# Altium PCB Mppt_PCB_seb.PcbDoc
Units mil, origin at the board's own origin, x right, y up, seen from the top; angles counter-clockwise.
Board outline 6000 x 4000 mil, 2 copper layers (Top Layer, Bottom Layer); 89 components, 51 nets, 266 pads, 9 vias.
Unrouted connection lines stored in the file: 163.
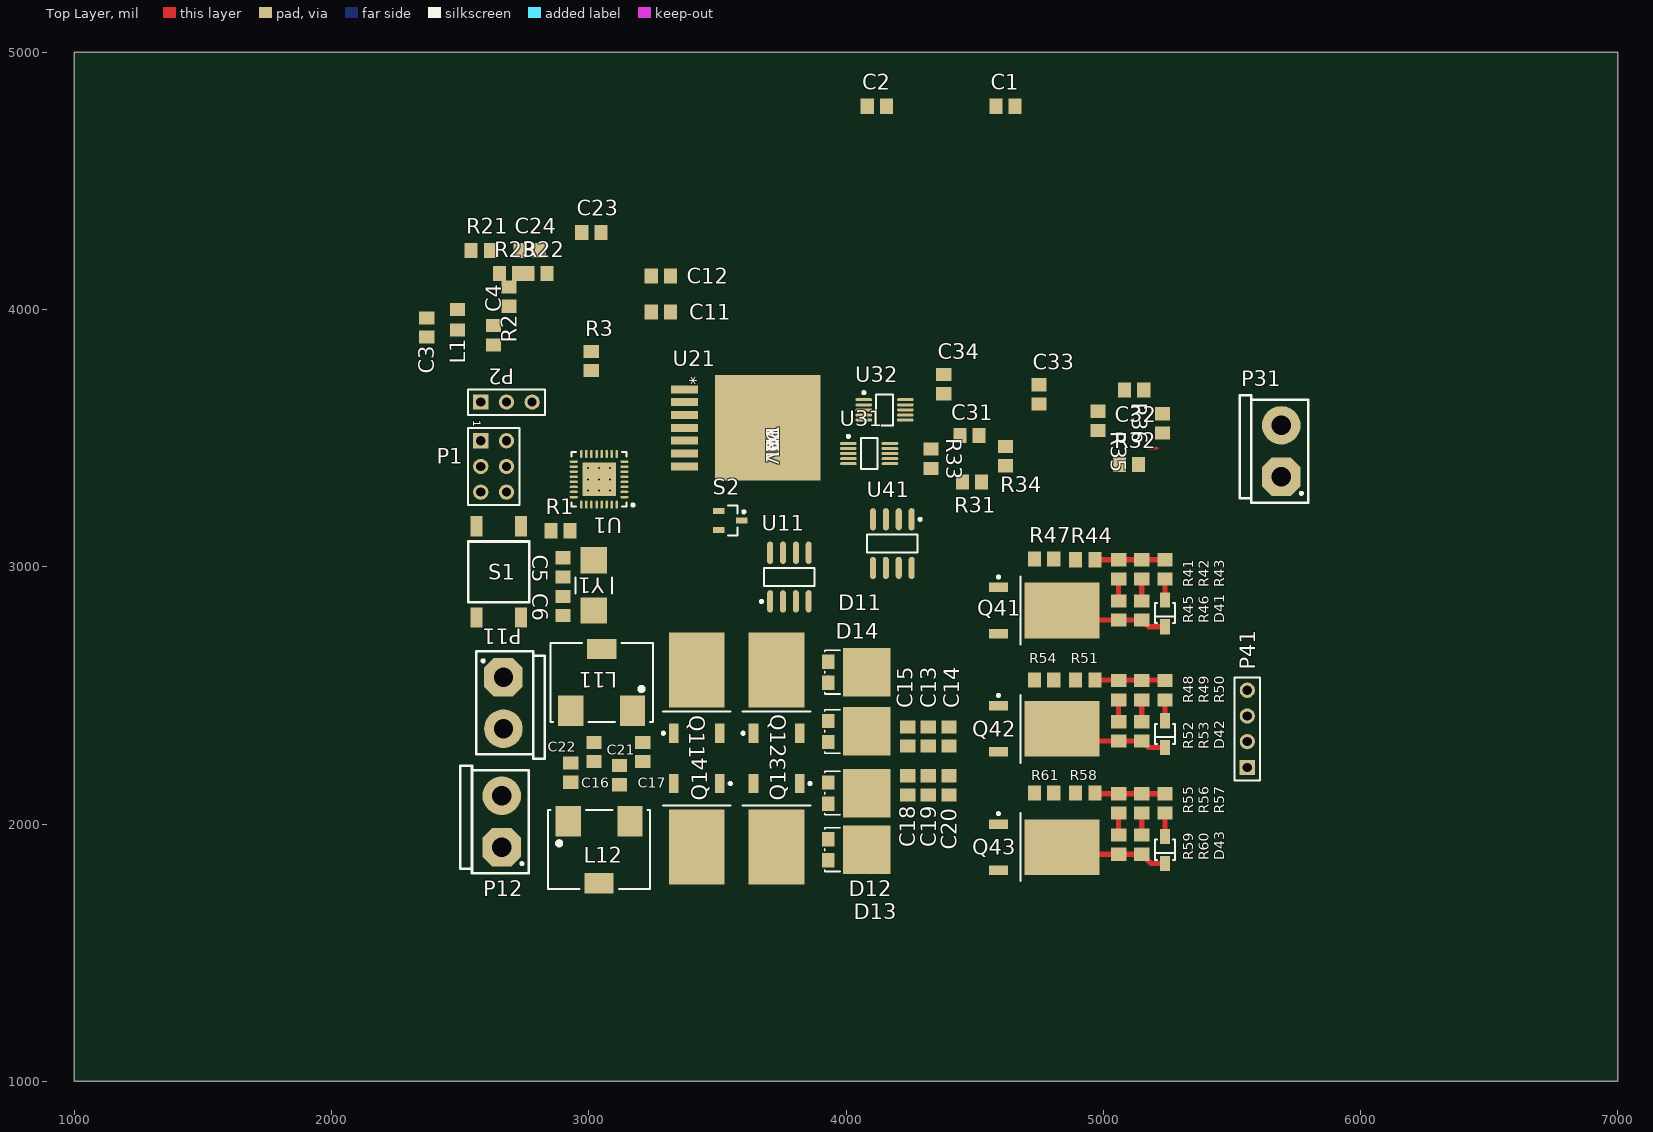
[diagram p0: Top Layer view]
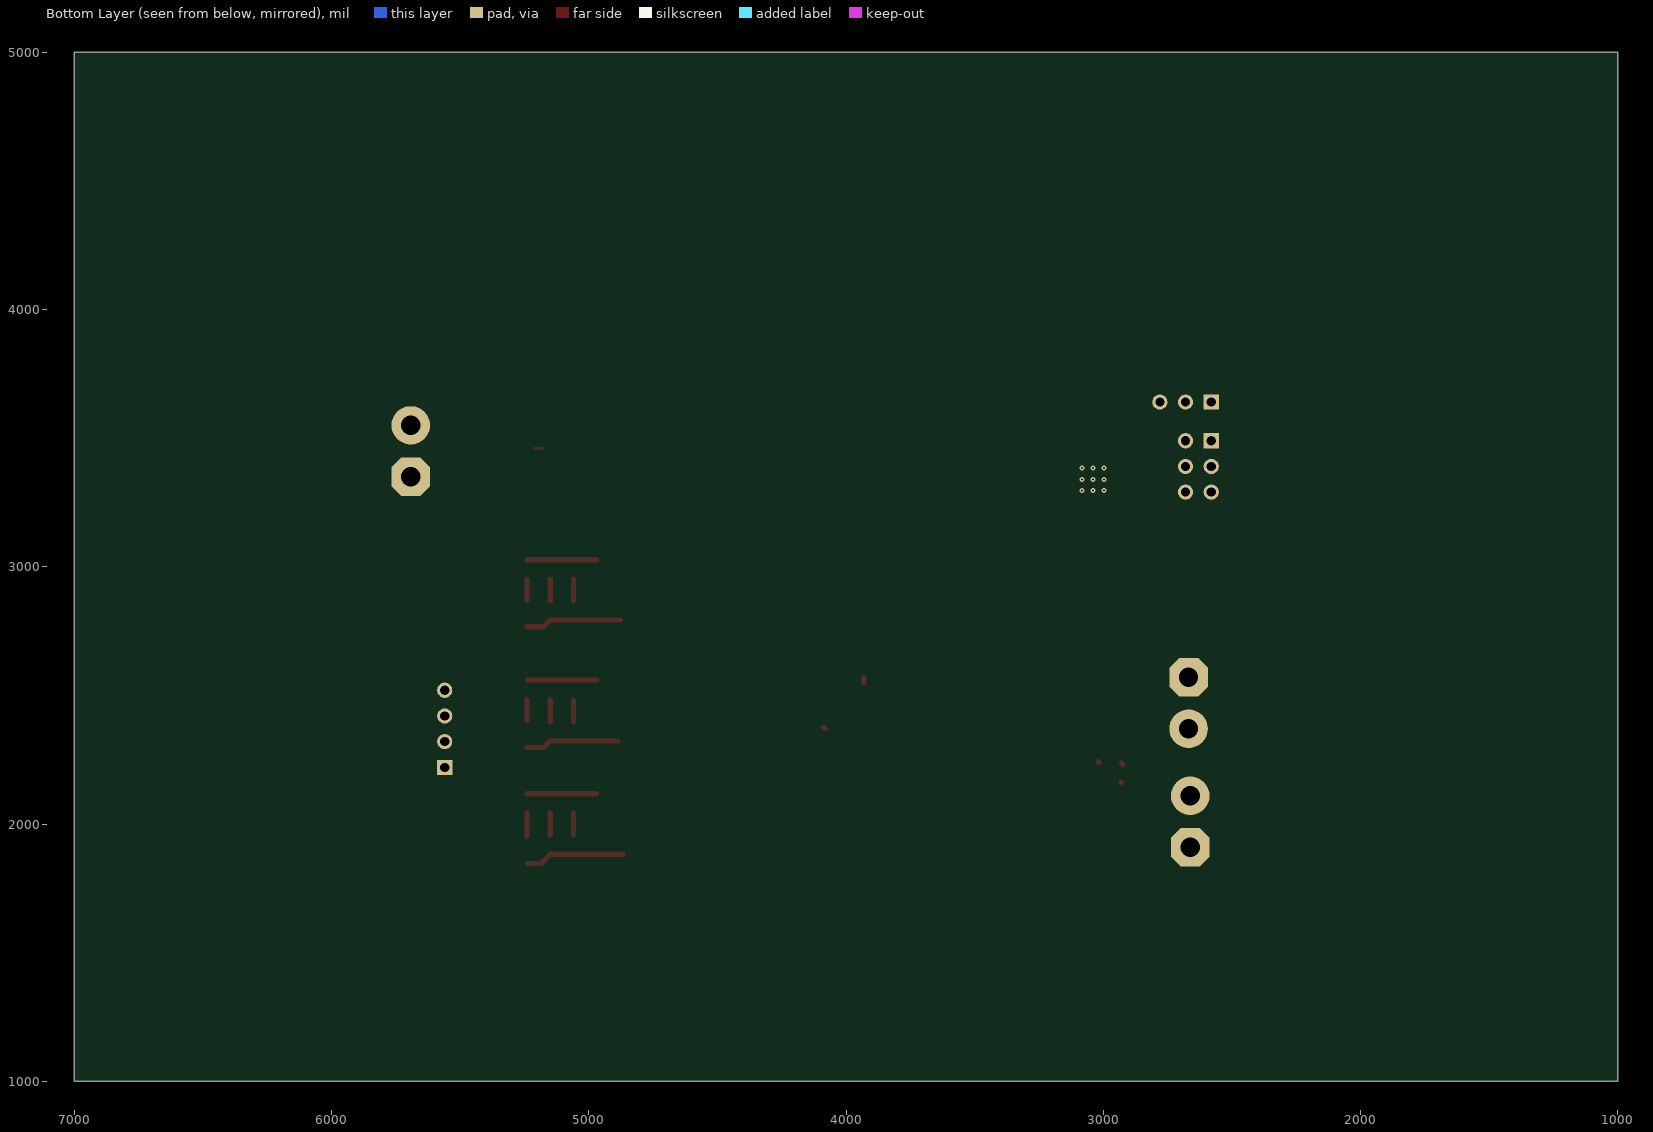
[diagram p1: Bottom Layer view, seen from below]

## Layer stack, top to bottom
Top Layer: signal copper 1.4
Dielectric: dielectric 12.6, FR-4, Dk 4.8
Bottom Layer: signal copper 1.4

## Board outline
1000,1000 7000,1000 7000,5000 1000,5000

## Design rules (kind name [scope] priority, off if disabled: settings)
Clearance Clearance_uC [InNetClass('uC')] p1: gap=6
Clearance [All] p2: gap=10
PolygonConnect [All] p1: connectstyle=Relief reliefconductorwidth=10 reliefentries=4 polygonreliefangle="90 Angle" airgapwidth=10
RoomDefinition Mppt_Sheet1 [InComponentClass('Mppt_Sheet1')] p1: confinementstyle=ConfineIn formatcopy=TRUE lockcomponents=FALSE outline 0,0 2000,0 2000,1000 0,1000
RoomDefinition CurrentSensor [InComponentClass('CurrentSensor')] p2: confinementstyle=ConfineIn formatcopy=TRUE lockcomponents=FALSE outline 0,0 2000,0 2000,1000 0,1000
RoomDefinition Buck [InComponentClass('Buck')] p3: confinementstyle=ConfineIn formatcopy=TRUE lockcomponents=FALSE outline 0,0 2000,0 2000,1000 0,1000
RoomDefinition Boost [InComponentClass('Boost')] p4: confinementstyle=ConfineIn formatcopy=TRUE lockcomponents=FALSE outline 0,0 2000,0 2000,1000 0,1000
RoomDefinition Balancer [InComponentClass('Balancer')] p5: confinementstyle=ConfineIn formatcopy=TRUE lockcomponents=FALSE outline 0,0 2000,0 2000,1000 0,1000
RoutingVias [All] p1: holewidth=28 width=50 viastyle="Through Hole" minholewidth=28 minwidth=50 maxholewidth=28 maxwidth=50
SolderMaskExpansion [All] p1: expansion=4
Width [All] p1: maxlimit=20 minlimit=20 preferedwidth=20
Width Width_Power [InNetClass('Power')] p2: maxlimit=30 minlimit=30 preferedwidth=30
Width Width_uC [InNetClass('uC')] p3: maxlimit=10 minlimit=10 preferedwidth=10
28 further rules are at their usual default settings.

## Classes and differential pairs
component class Balancer: D41 D42 D43 P41 Q41 Q42 Q43 R41 R42 R43 R44 R45 R46 R47 R48 R49 R50 R51 R52 R53 R54 R55 R56 R57 R58 R59 R60 R61 U41
component class Boost: C11 C12 C13 C14 C15 C16 C17 C18 C19 C20 C21 C22 D11 D12 D13 D14 L11 L12 P11 P12 Q11 Q12 Q13 Q14 U11
component class Buck: C23 C24 R21 R22 R23 U21
component class CurrentSensor: C31 C32 C33 C34 P31 R31 R32 R33 R34 R35 R36 U31 U32
component class Mppt_Sheet1: C1 C2 C3 C4 C5 C6 L1 P1 P2 R1 R2 R3 S1 S2 U1 Y1
net class Power: GND NetC13_2 NetC16_2 NetC18_2 NetC21_2 NetC23_1 NetD11_A1 NetD13_A1 NetD41_1 NetD41_2 NetD42_1 NetD42_2 NetD43_1 NetD43_2 NetP41_2 NetP41_3 NetR41_1 NetR42_1 NetR48_1 NetR49_1 NetR55_1 NetR56_1
net class uC: +5V GND NetC2_1 NetC3_2 NetC4_2 NetC5_1 NetC6_1 NetC31_1 NetC31_2 NetC32_1 NetC32_2 NetP1_1 NetP1_3 NetP1_4 NetP2_1 NetP2_2 NetQ43_1 NetR3_1 NetR44_1 NetR51_1 NetR58_1 NetU1_2 NetU1_15 NetU1_17 NetU31_1 NetU32_1

## Components (designator, comment, footprint, x,y, rotation, side; value= is the part's Value field where it differs from the comment)
C1 "Cap_cer_100n_50V" _0805 4620,4790 r0 top
C2 "Cap_cer_10n_50V" _0805 4120,4790 r0 top
C3 "Cap_cer_100n_50V" _0805 2370,3930 r90 top
C4 "Cap_cer_100n_50V" _0805 2630,3900 r90 top
C5 "Cap_cer_12p_50V" _0805 2900,2997.48 r270 top
C6 "Cap_cer_12p_50V" _0805 2900,2847.48 r270 top
C11 "Cap_cer_4.7u_50V" _0805 3280,3990 r180 top
C12 "Cap_cer_100n_50V" _0805 3280,4130 r180 top
C13 "" _0805 4320,2340 r90 top
C14 "Cap_cer_22µ_25V" _0805 4400,2340 r90 top
C15 "Cap_cer_100n_50V" _0805 4240,2340 r90 top
C16 "Cap_cer_22µ_25V" _0805 3020,2280 r90 top
C17 "Cap_cer_100n_50V" _0805 3210,2280 r90 top
C18 "Cap_cer_22µ_25V" _0805 4240,2150 r270 top
C19 "Cap_cer_22µ_25V" _0805 4320,2150 r270 top
C20 "Cap_cer_100n_50V" _0805 4400,2150 r270 top
C21 "Cap_cer_22µ_25V" _0805 3120,2190 r270 top
C22 "Cap_cer_100n_50V" _0805 2930,2200 r270 top
C23 "Cap_cer_10n_50V" _0805 3010,4300 r0 top
C24 "Cap_cer_100n_50V" _0805 2770,4230 r0 top
C31 "Cap_cer_100n_50V" _0805 4480,3510 r0 top
C32 "Cap_cer_100n_50V" _0805 5120,3687.4 r0 top
C33 "Cap_cer_100n_50V" _0805 4750,3670 r90 top
C34 "Cap_cer_100n_50V" _0805 4380,3710 r90 top
D11 "V10P45S" TO-277A 4040,2590 r270 top
D12 "V10P45S" TO-277A 4040,2360 r270 top
D13 "V10P45S" TO-277A 4040,1900 r270 top
D14 "V10P45S" TO-277A 4040,2120 r270 top
D41 "LED_SMD" LED_SMD 5240,2820 r90 top
D42 "LED_SMD" LED_SMD 5240,2350 r90 top
D43 "LED_SMD" LED_SMD 5240,1900 r90 top
L1 "IND_47u_0A055" COIL_0805 2490,3960 r270 top
L11 "HCF1007" HCF1007 3050,2550 r180 top
L12 "HCF1007" HCF1007 3040,1900 r0 top
P1 "Header 3X2" HDR2X3 2580,3490 r270 top
P2 "Header 3" HDR1X3 2580,3640 r0 top
P11 "WRTBL_2P_508" WRTBL_2P_508 2660,2470 r270 top
P12 "WRTBL_2P_508" WRTBL_2P_508 2670,2010 r90 top
P31 "WRTBL_2P_508" WRTBL_2P_508 5700,3450 r90 top
P41 "Header 4" HDR1X4 5560,2220 r90 top
Q11 "IRFR024N" TO-252AA_N 3420,2530 r90 top
Q12 "IRFR024N" TO-252AA_N 3730,2530 r90 top
Q13 "IRFR024N" TO-252AA_N 3730,1980 r270 top
Q14 "IRFR024N" TO-252AA_N 3420,1980 r270 top
Q41 "IRFR024N" TO-252AA_N 4770,2830 r0 top
Q42 "IRFR024N" TO-252AA_N 4770,2370 r0 top
Q43 "IRFR024N" TO-252AA_N 4770,1910 r0 top
R1 "Res_0805" _0805 2890,3140 r0 top
R2 "Res_0805" _0805 2690,4050 r90 top
R3 "Res_0805" _0805 3010,3800 r90 top
R21 "Res_0805" _0805 2580,4230 r180 top
R22 "Res_0805" _0805 2800,4140 r0 top
R23 "Res_0805" _0805 2690,4140 r180 top
R31 "Res_0805" _0805 4490,3330 r0 top
R32 "Res_0805" _0805 5100,3397.4 r0 top
R33 "Res_0805" _0805 4330,3420 r90 top
R34 "Res_0805" _0805 4620,3430 r270 top
R35 "Res_0805" _0805 4980,3567.4 r270 top
R36 "Res_0805" _0805 5230,3557.4 r270 top
R41 "Res_0805" _0805 5060,2990 r90 top
R42 "Res_0805" _0805 5150,2990 r90 top
R43 "Res_0805" _0805 5240,2990 r90 top
R44 "Res_0805" _0805 4930,3027.4 r0 top
R45 "Res_0805" _0805 5060,2830 r90 top
R46 "Res_0805" _0805 5150,2830 r90 top
R47 "Res_0805" _0805 4770,3030 r0 top
R48 "Res_0805" _0805 5060,2520 r90 top
R49 "Res_0805" _0805 5150,2520 r90 top
R50 "Res_0805" _0805 5240,2520 r90 top
R51 "Res_0805" _0805 4930,2560 r0 top
R52 "Res_0805" _0805 5060,2360 r90 top
R53 "Res_0805" _0805 5150,2360 r90 top
R54 "Res_0805" _0805 4770,2560 r0 top
R55 "Res_0805" _0805 5060,2080 r90 top
R56 "Res_0805" _0805 5150,2080 r90 top
R57 "Res_0805" _0805 5240,2080 r90 top
R58 "Res_0805" _0805 4930,2120 r0 top
R59 "Res_0805" _0805 5060,1920 r90 top
R60 "Res_0805" _0805 5150,1920 r90 top
R61 "Res_0805" _0805 4770,2120 r0 top
S1 "Reset" SWITCH_SMD 2650,2980 r90 top
S2 "ZRC400" SOT23_N 3550,3180 r0 top
U1 "ATtiny26L-8MU" 32M1-A_N 3040,3340 r180 top
U11 "MAX4427ESA" NSO8_N 3780,2960 r90 top
U21 "LMZ12001_NDW_7" TZA07A 3690,3540 r270 top
U31 "MAX9611AUB+" MAXM-U10+2_N 4090,3440 r0 top
U32 "MAX9611AUB+" MAXM-U10+2_N 4150,3610 r0 top
U41 "MAX4427ESA" NSO8_N 4180,3090 r270 top
Y1 "Crystal_16.0MHz" XTAL_SMD 3020,2927.48 r90 top

## Footprints (in the part's own frame and the unit in brackets; to place one, negate y for a bottom-side part, rotate by r counter-clockwise, add the part's x,y. Pads: shape width x height; smd on the part's side, far side on the other; paste and mask are expansions set on the pad)
32M1-A_N [mm] "QFN, 32-Leads, Body 5x5mm, Pitch 0.5mm, Thermal Pad 3.3x3.3mm, IPC Medium Density"
  oval 0.8x0.25 smd: 1(-2.5,1.75) 2(-2.5,1.25) 3(-2.5,0.75) 4(-2.5,0.25) 5(-2.5,-0.25) 6(-2.5,-0.75) 7(-2.5,-1.25) 8(-2.5,-1.75) 17(2.5,-1.75) 18(2.5,-1.25) 19(2.5,-0.75) 20(2.5,-0.25) 21(2.5,0.25) 22(2.5,0.75) 23(2.5,1.25) 24(2.5,1.75)
  oval 0.25x0.8 smd: 9(-1.75,-2.5) 10(-1.25,-2.5) 11(-0.75,-2.5) 12(-0.25,-2.5) 13(0.25,-2.5) 14(0.75,-2.5) 15(1.25,-2.5) 16(1.75,-2.5) 25(1.75,2.5) 26(1.25,2.5) 27(0.75,2.5) 28(0.25,2.5) 29(-0.25,2.5) 30(-0.75,2.5) 31(-1.25,2.5) 32(-1.75,2.5)
  rect 3.3x3.3 smd: 33(0,0)
  silkscreen extent -3.48,-2.7 2.7,2.7, body extent -2.55,-2.55 2.55,2.55, height 1
_0805 [mm]
  rect 1.3x1.5 smd: 1(-0.95,0) 2(0.95,0)
  body extent -1,-0.64 1,0.62, height 0.78
COIL_0805 [mm]
  rect 1.3x1.5 smd: 1(-1.014,0) 2(1.014,0)
  body extent -1,-0.64 1,0.62, height 0.78
HCF1007 [mm]
  rect 2.5x3 smd: 1(-3.05,2.8) 2(3.05,2.8)
  rect 2.9x2 smd: ""(0,-3.3)
  silkscreen extent -5.05,-3.9 5.05,3.9
HDR1X3 [mm] "Connector; Header; 3 Position"
  rect 1.5x1.5 hole 0.9: 1(0,0)
  round 1.5 hole 0.9: 2(2.54,0) 3(5.08,0)
  silkscreen extent -1.27,-1.27 6.35,1.27, body extent -0.3,-0.29 5.38,0.3, height 7
HDR1X4 [mm] "Connector; Header; 4 Position"
  rect 1.5x1.5 hole 0.9: 1(0,0)
  round 1.5 hole 0.9: 2(2.54,0) 3(5.08,0) 4(7.62,0)
  silkscreen extent -1.27,-1.27 8.89,1.27, body extent -0.3,-0.29 7.92,0.3, height 7
HDR2X3 [mm] "Connector; Header; 3x2 Position"
  rect 1.5x1.5 hole 0.9: 1(0,0)
  round 1.5 hole 0.9: 2(0,2.54) 3(2.54,0) 4(2.54,2.54) 5(5.08,0) 6(5.08,2.54)
  silkscreen extent -1.27,-1.27 6.35,3.81, body extent -0.3,-0.29 5.38,2.84, height 7
LED_SMD [mm]
  rect 1.5x1 smd: 1(1.298,0) 2(-1.349,0)
  silkscreen extent -1,-0.98 1,0.98, body extent -1.12,-0.85 1.23,0.85, height 1.3
MAXM-U10+2_N [mm] "SOP, 10-Leads, Body 3x3mm, Pitch 0.5mm, IPC Medium Density"
  oval 1.65x0.3 smd: 1(-2.05,1) 2(-2.05,0.5) 3(-2.05,0) 4(-2.05,-0.5) 5(-2.05,-1) 6(2.05,-1) 7(2.05,-0.5) 8(2.05,0) 9(2.05,0.5) 10(2.05,1)
  silkscreen extent -2.17,-1.52 0.82,1.82, body extent -1.55,-1.55 1.55,1.55, height 1.1
NSO8_N [mm] "SOIC, 8-Leads, Body 4.9x3.9mm, Pitch 1.27mm, IPC Medium Density"
  oval 2.2x0.6 smd: 1(-2.4,1.905) 2(-2.4,0.635) 3(-2.4,-0.635) 4(-2.4,-1.905) 5(2.4,-1.905) 6(2.4,-0.635) 7(2.4,0.635) 8(2.4,1.905)
  silkscreen extent -2.52,-2.5 0.9,2.88, body extent -2,-2.5 2,2.5, height 1.75
SOT23_N [mm] "SOT23, 3-Leads, Body 2.9x1.3mm, Pitch 0.95mm, Lead Span 2.3mm - Reverse Pinning, IPC Medium Density"
  rect 1.15x0.6 smd: 1(1.125,0) 2(-1.125,-0.95) 3(-1.125,0.95)
  silkscreen extent -0.2,-1.5 1.48,1.5, body extent -0.7,-1.5 0.7,1.5, height 1.1
SWITCH_SMD [mm]
  rect 2x1.2 smd: 1(-4.5,2.2) 1(4.5,2.2) 2(-4.5,-2.2) 2(4.5,-2.2)
  silkscreen extent -3,-3 3,3, body extent -5.02,-3 5.02,2.95, height 5
TO-252AA_N [mm] "D-PAK, 4-Leads, Body 6.1x6.5mm, Pitch 2.28mm, Lead Span 9.9mm, IPC Medium Density"
  rect 1.9x0.95 smd: 1(-4.5,2.28) 3(-4.5,-2.28)
  rect 7.4x5.5 smd: 4(1.75,0)
  silkscreen extent -4.62,-3.35 -2.35,3.43, body extent -2.25,-3.37 4.1,3.37, height 2.38
TO-277A [mm]
  rect 1.4x1.27 smd: 1(1.04,-2.765) 2(-1.04,-2.765)
  rect 4.8x4.72 smd: K(0,1.04)
  silkscreen extent -2.15,-3.1 2.15,-1.6
TZA07A [mil]
  rect 31x105 smd: 1(-150,-318) 2(-100,-318) 3(-50,-318) 4(0,-318) 5(50,-318) 6(100,-318) 7(150,-318)
  rect 410x410 smd: 8(0,6)
WRTBL_2P_508 [mil]
  oct 150x150 hole 75: 1(-100.37,8.33)
  round 150 hole 75: 2(99.63,8.33)
  silkscreen extent -201,-97 217,169, body extent -190,-95 205,168, height 550
XTAL_SMD [mm]
  rect 2.6x2.6 smd: 1(-2.476,0) 2(2.476,0)
  silkscreen extent -0.8,-1.8 0.8,1.8, body extent -2.4,-1.8 2.4,1.8, height 1.4

## Part data
C1 C3 C4 C11 C12 C13 C14 C15 C16 C17 C18 C19 C20 C21 C22 C24 C33 C34: library part Cap_124
C2 C23 C31 C32: library part Cap_120
C5 C6: library part Cap_109
D11 D12 D13 D14: "V01P45 Shottky Diode"
D41 D42 D43: library part DIODE_48
L1: library part Ind_41, "Inductor"
L11 L12: "HCF1007 Inductor"
P1: library part Con_41
P2: library part Con_32
P11 P12 P31: library part Con_7
P41: library part Con_33
Q11 Q12 Q13 Q14 Q41 Q42 Q43: "HEXFET N-Channel Power MOSFET"
R1 R2 R3 R21 R22 R23 R31 R32 R33 R34 R35 R36 R41 R42 R43 R44 R45 R46 R47 R48 R49 R50 R51 R52 R53 R54 R55 R56 R57 R58 R59 R60 R61: library part Res_6
S1: library part Misc_11
S2: library part Misc_1, "4,096V Voltage Regulator"
U1: "8-bit AVR Microcontroller, 2.7-5.5V, 8MHz, 2KB Flash, 128 Bytes EEPROM, 128 Bytes SRAM, 32-pin MLF, Industrial Grade (-40°C to 85°C), Pb-Free"
U11 U41: "Dual High-Speed 1.5A MOSFET Driver"
U21: "Imported"
U31 U32: "High-side Current-Sense Amplifier with 12-bit I2C ADC and Op Amp / Comparator - Non-inverting, Adjustable Gain, -40 to 125 degC, 10-Pin SOP (U10+2), Pb-Free"
Y1: library part Crystal_19

## Via types
v1: diameter 19.68, hole 7.87, Top Layer to Bottom Layer, 9 vias

## Nets (pads, with @x,y where several pads share a name; then routed paths per layer and width w, separated by ;. In a path a pad name is that pad's centre, name@x,y a point inside that pad or via, vN(x,y) a via of type N, cw(c..) or ccw(c..) an arc to the next point about the centre after c; other vN are vias at no path point)
+5V: C1.2 C11.2 C12.2 C24.2 C33.1 C34.2 P1.2 R1.1 R2.1 R3.2 R22.1 U1.4 U11.6 U21.7 U31.10 U32.9 U32.10
GND: C1.1 C2.2 C3.1 C4.1 C5.2 C6.2 C11.1 C12.1 C13.1 C14.1 C15.1 C16.1 C17.1 C18.1 C19.1 C20.1 C21.1 C22.1 C23.2 C24.1 C33.2 C34.1 P1.6 P2.3 P11.2 P12.2 P31.2 P41.1 Q11.3 Q12.3 Q13.3 Q14.3 Q43.3 R23.2 R47.1 R54.1 R61.1 S1.2 S2.1 S2.2 U1.5 U1.21 U11.3 U21.4 U31.4 U31.5 U31.8 U31.9 U32.4 U32.5 U32.8 U41.3 | length 14.8
  Top Layer w20: C22.1@2922.6,2230 C22.1 ; C16.1@3016.91,2239.51 C16.1
NetC2_1: C2.1 P1.5 R1.2 S1.1 U1.11
NetC3_2: C3.2 L1.1 R2.2
NetC4_2: C4.2 L1.2 U1.18
NetC5_1: C5.1 U1.7 Y1.2
NetC6_1: C6.1 U1.8 Y1.1
NetC13_2: C13.2 C14.2 C15.2 D11.K D12.K R31.1 R33.2 | length 10.5
  Top Layer w20: D12.K@4080.94,2370 D12.K@4088.35,2377.4
NetC16_2: C16.2 C17.2 L11.2 P11.1
NetC18_2: C18.2 C19.2 C20.2 D13.K D14.K R32.1 R35.2
NetC21_2: C21.2 C22.2 L12.1 P12.1 | length 0.1
  Top Layer w20: C22.2@2929.92,2162.52 C22.2
NetC23_1: C23.1 P31.1 P41.4 R21.2 R31.2 R32.2 R34.2 R36.2 R41.2 R42.2 R43.2 R44.2 U21.1 U41.6 | length 272.6
  Top Layer w20: R44.2 R41.2 R42.2 R43.2
NetC31_1: C31.1 R33.1 U31.2
NetC31_2: C31.2 R34.1 U31.3
NetC32_1: C32.1 R35.1 U32.2
NetC32_2: C32.2 R36.1 U32.3
NetD11_A1: D11.1 D11.2 D12.1 D12.2 L11.1 Q11.4 Q12.4 | length 19.8
  Top Layer w20: D11.1 D11.1@3931.14,2568.86
NetD13_A1: D13.1 D13.2 D14.2 L12.2 Q13.4 Q14.4
NetD41_1: D41.1 R43.1 | length 81.5
  Top Layer w20: D41.1 R43.1
NetD41_2: D41.2 Q41.4 R45.1 R46.1 | length 374.4
  Top Layer w20: Q41.4@4876.3,2792.6 R45.1 R46.1 5175.72,2766.88 D41.2
NetD42_1: D42.1 R50.1 | length 81.5
  Top Layer w20: D42.1 R50.1
NetD42_2: D42.2 Q42.4 R52.1 R53.1 | length 364.4
  Top Layer w20: Q42.4@4886.3,2322.6 R52.1 R53.1 5175.72,2296.88 D42.2
NetD43_1: D43.1 R57.1 | length 91.5
  Top Layer w20: D43.1 R57.1
NetD43_2: D43.2 Q43.4 R59.1 R60.1 | length 388.5
  Top Layer w20: Q43.4@4866.3,1882.6 R59.1 R60.1 5185.72,1846.88 D43.2
NetP1_1: P1.1 U1.31 U11.2
NetP1_3: P1.3 U1.32 U31.6 U32.6
NetP1_4: P1.4 U1.30 U31.7 U32.7
NetP2_1: P2.1 U1.13
NetP2_2: P2.2 U1.10
NetP41_2: P41.2 Q42.3 R55.2 R56.2 R57.2 R58.2 | length 270
  Top Layer w20: R58.2@4970,2117.4 R55.2 R56.2 R57.2
NetP41_3: P41.3 Q41.3 R48.2 R49.2 R50.2 R51.2 | length 270
  Top Layer w20: R51.2 R50.2@5237.4,2560
NetQ11_1: Q11.1 Q12.1 U11.7
NetQ13_1: Q13.1 Q14.1 U11.5
NetQ41_1: Q41.1 U41.7
NetQ42_1: Q42.1 U41.5
NetQ43_1: Q43.1 U1.14
NetR3_1: R3.1 S2.3 U1.22
NetR21_1: R21.1 U21.2
NetR22_2: R22.2 R23.1 U21.6
NetR41_1: R41.1 R45.2 | length 85.2
  Top Layer w20: R45.2 R41.1
NetR42_1: R42.1 R46.2 | length 85.2
  Top Layer w20: R46.2 R42.1
NetR44_1: R44.1 R47.2 U1.26
NetR48_1: R48.1 R52.2 | length 85.2
  Top Layer w20: R52.2 R48.1
NetR49_1: R49.1 R53.2 | length 85.2
  Top Layer w20: R53.2 R49.1
NetR51_1: R51.1 R54.2 U1.25
NetR55_1: R55.1 R59.2 | length 85.2
  Top Layer w20: R59.2 R55.1
NetR56_1: R56.1 R60.2 | length 85.2
  Top Layer w20: R60.2 R56.1
NetR58_1: R58.1 R61.2 U1.23
NetU1_2: U1.2 U11.4
NetU1_15: U1.15 U41.4
NetU1_17: U1.17 U41.2
pads on no net: D14.1 L11. L12. U1.1 U1.3 U1.6 U1.9 U1.12 U1.16 U1.19 U1.20 U1.24 U1.27 U1.28 U1.29 U1.33 U11.1 U11.8 U21.3 U21.5 U21.8 U31.1 U32.1 U41.1 U41.8
copper on no net: | length 30
  Top Layer w10: 5180,3460 5210,3460
  other v1: 2996.69,3296.69 3040,3296.69 3083.31,3296.69 2996.69,3340 3040,3340 3083.31,3340 2996.69,3383.31 3040,3383.31 3083.31,3383.31

## Text inside footprints (layer, text, board x,y; h text height)
P1: Top Overlay "1" at 2550,3570 h30 r270
U21: Top Overlay "TOL" at 3690,3540 h50 r270; Top Overlay "VAL" at 3690,3540 h50 r270; Top Overlay "DEV" at 3690,3540 h50 r270; Top Overlay "PN" at 3690,3540 h50 r270; Top Overlay "*" at 3372,3740 h50 r270; Mechanical 1 "RefDes2" at 3690,3540 h50 r270; Mechanical 1 "*" at 3372,3740 h50 r270